# Altium PCB CommsPCB.PcbDoc
Units mm, origin at the board's own origin, x right, y up, seen from the top; angles counter-clockwise.
Board outline 85 x 80 mm, 4 copper layers (Top Layer, Internal Plane 1, Internal Plane 2, Bottom Layer), stack 1.782 mm thick; 124 components, 97 nets, 364 pads, 92 vias.
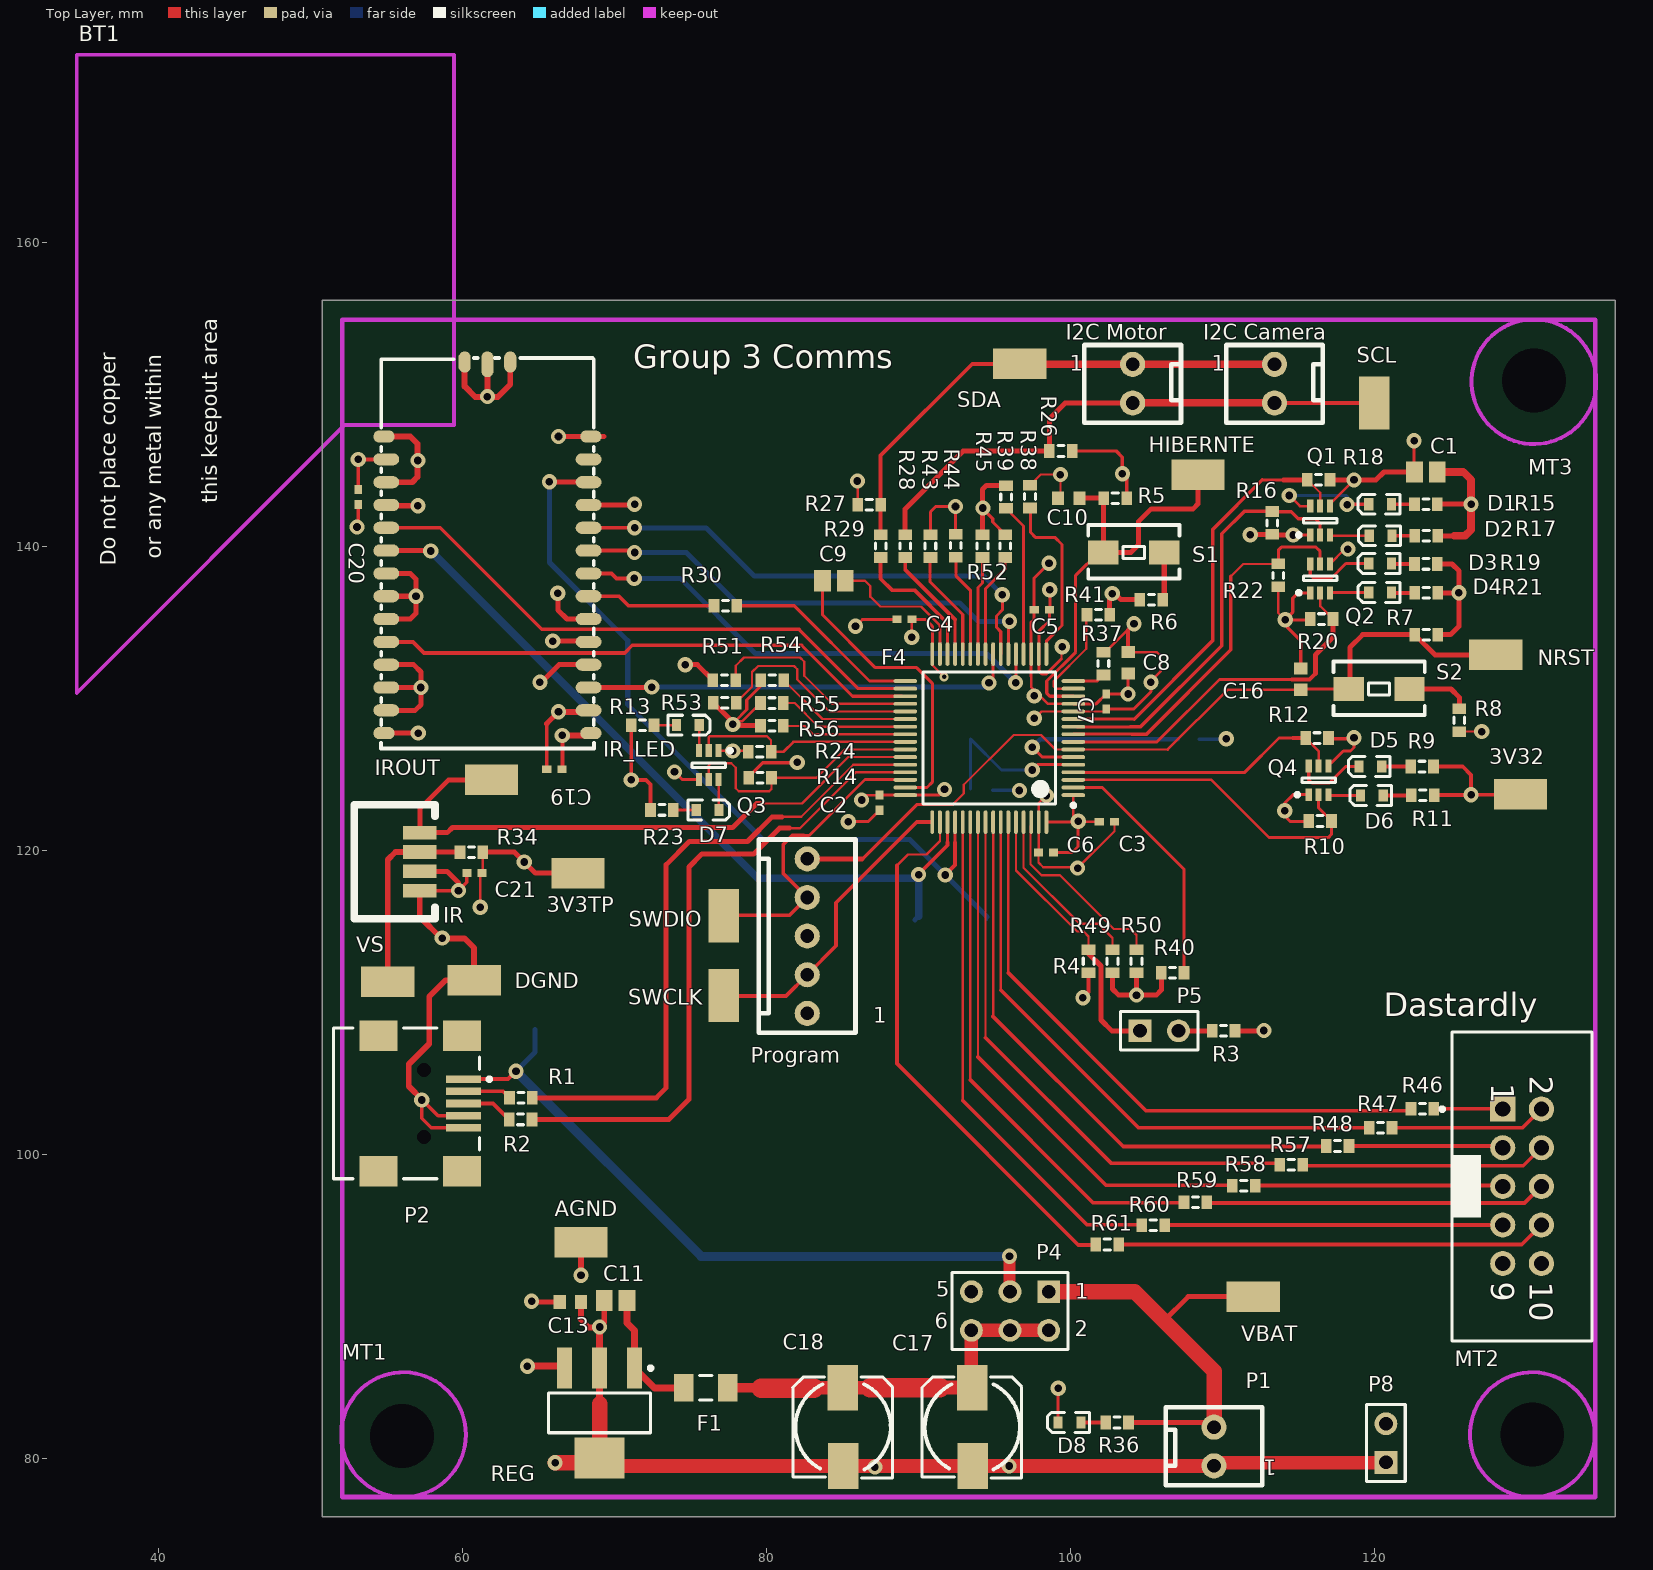
[diagram p0: Top Layer view]
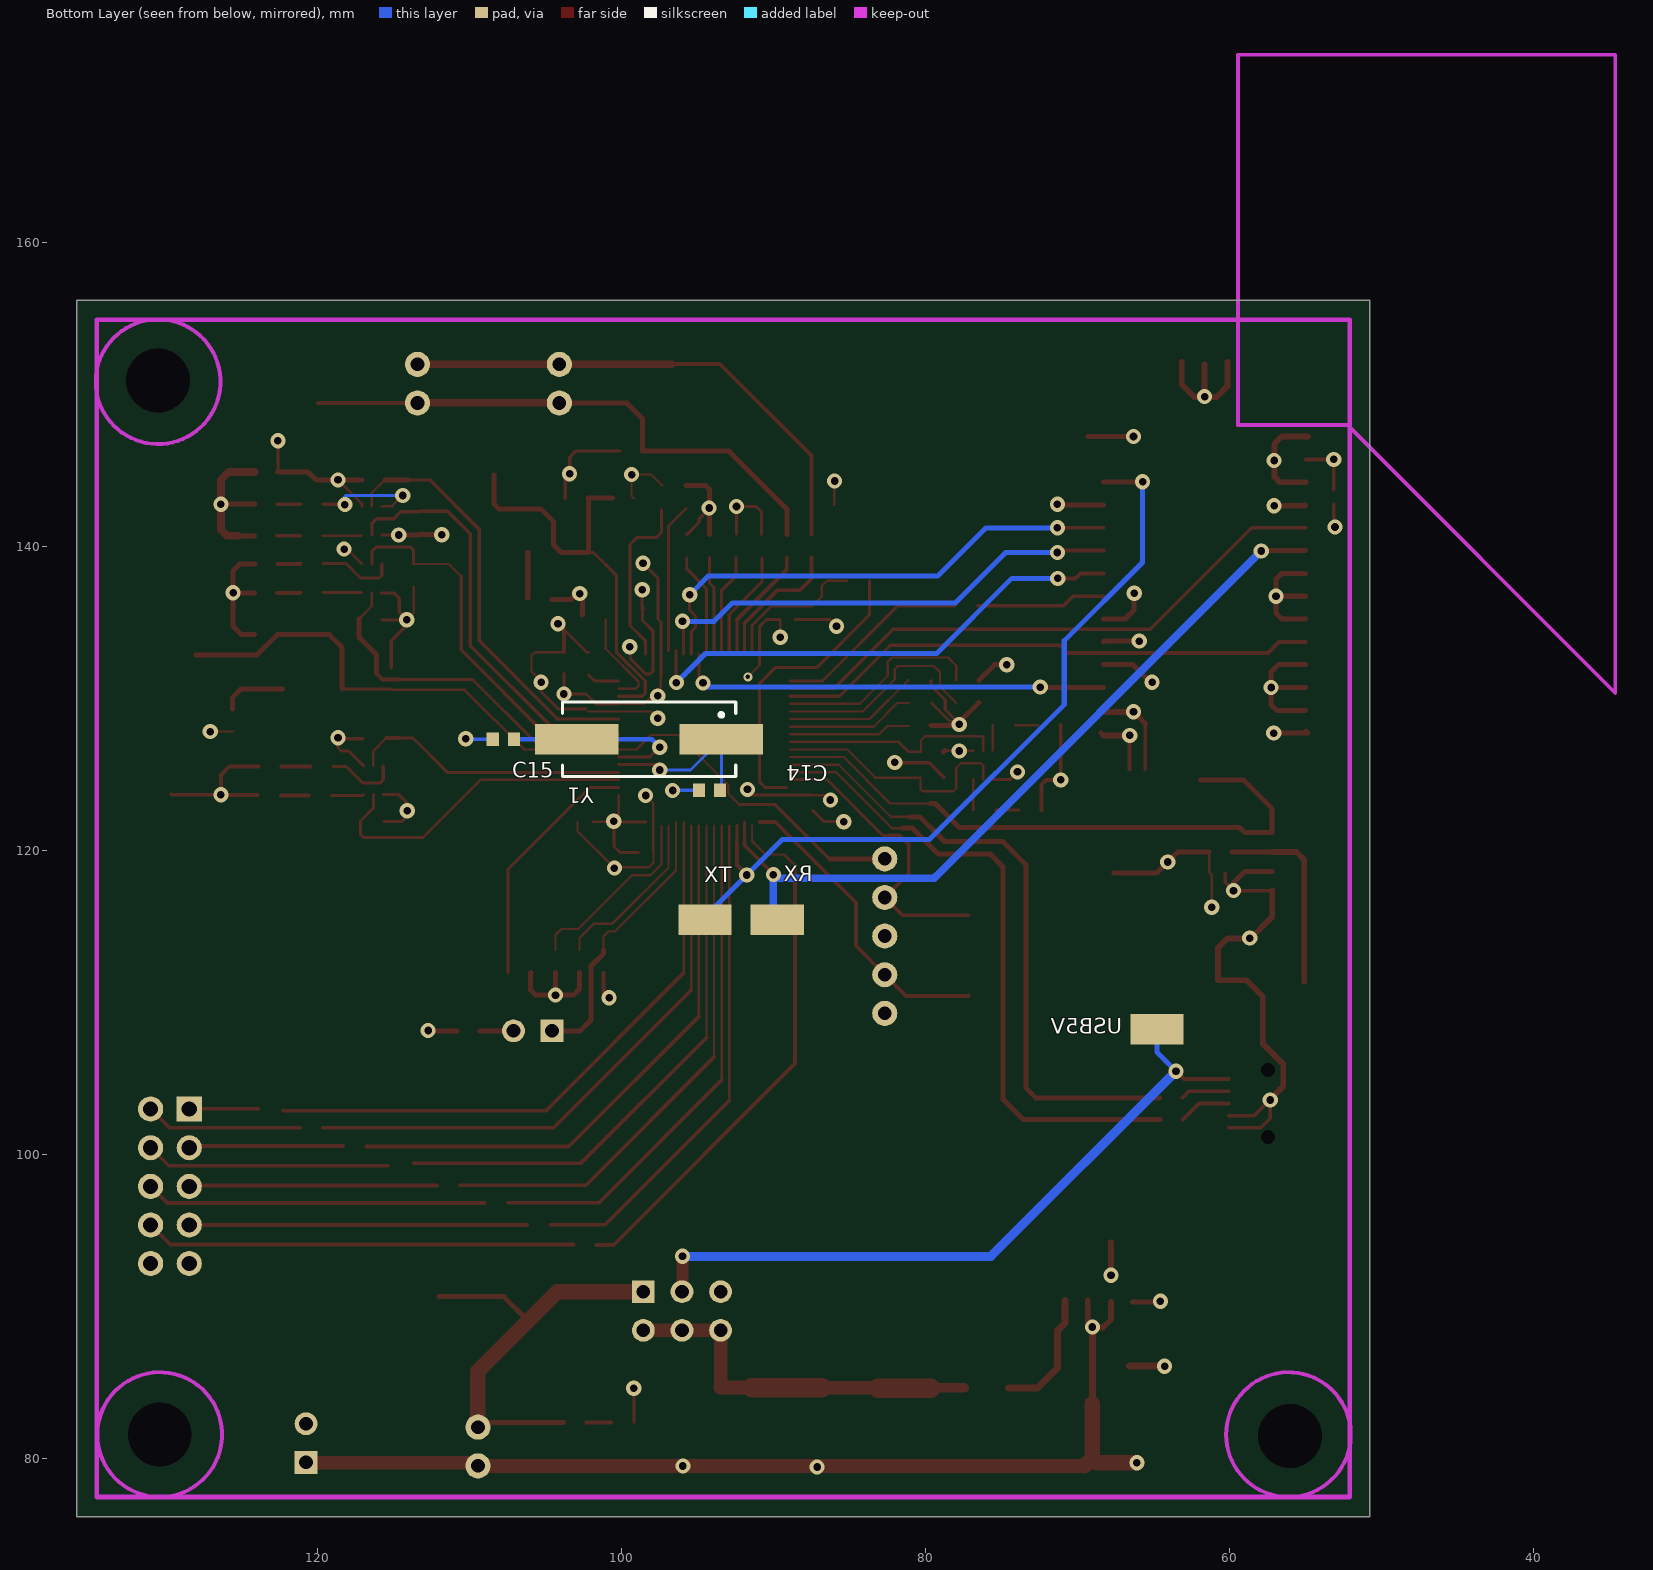
[diagram p1: Bottom Layer view, seen from below]
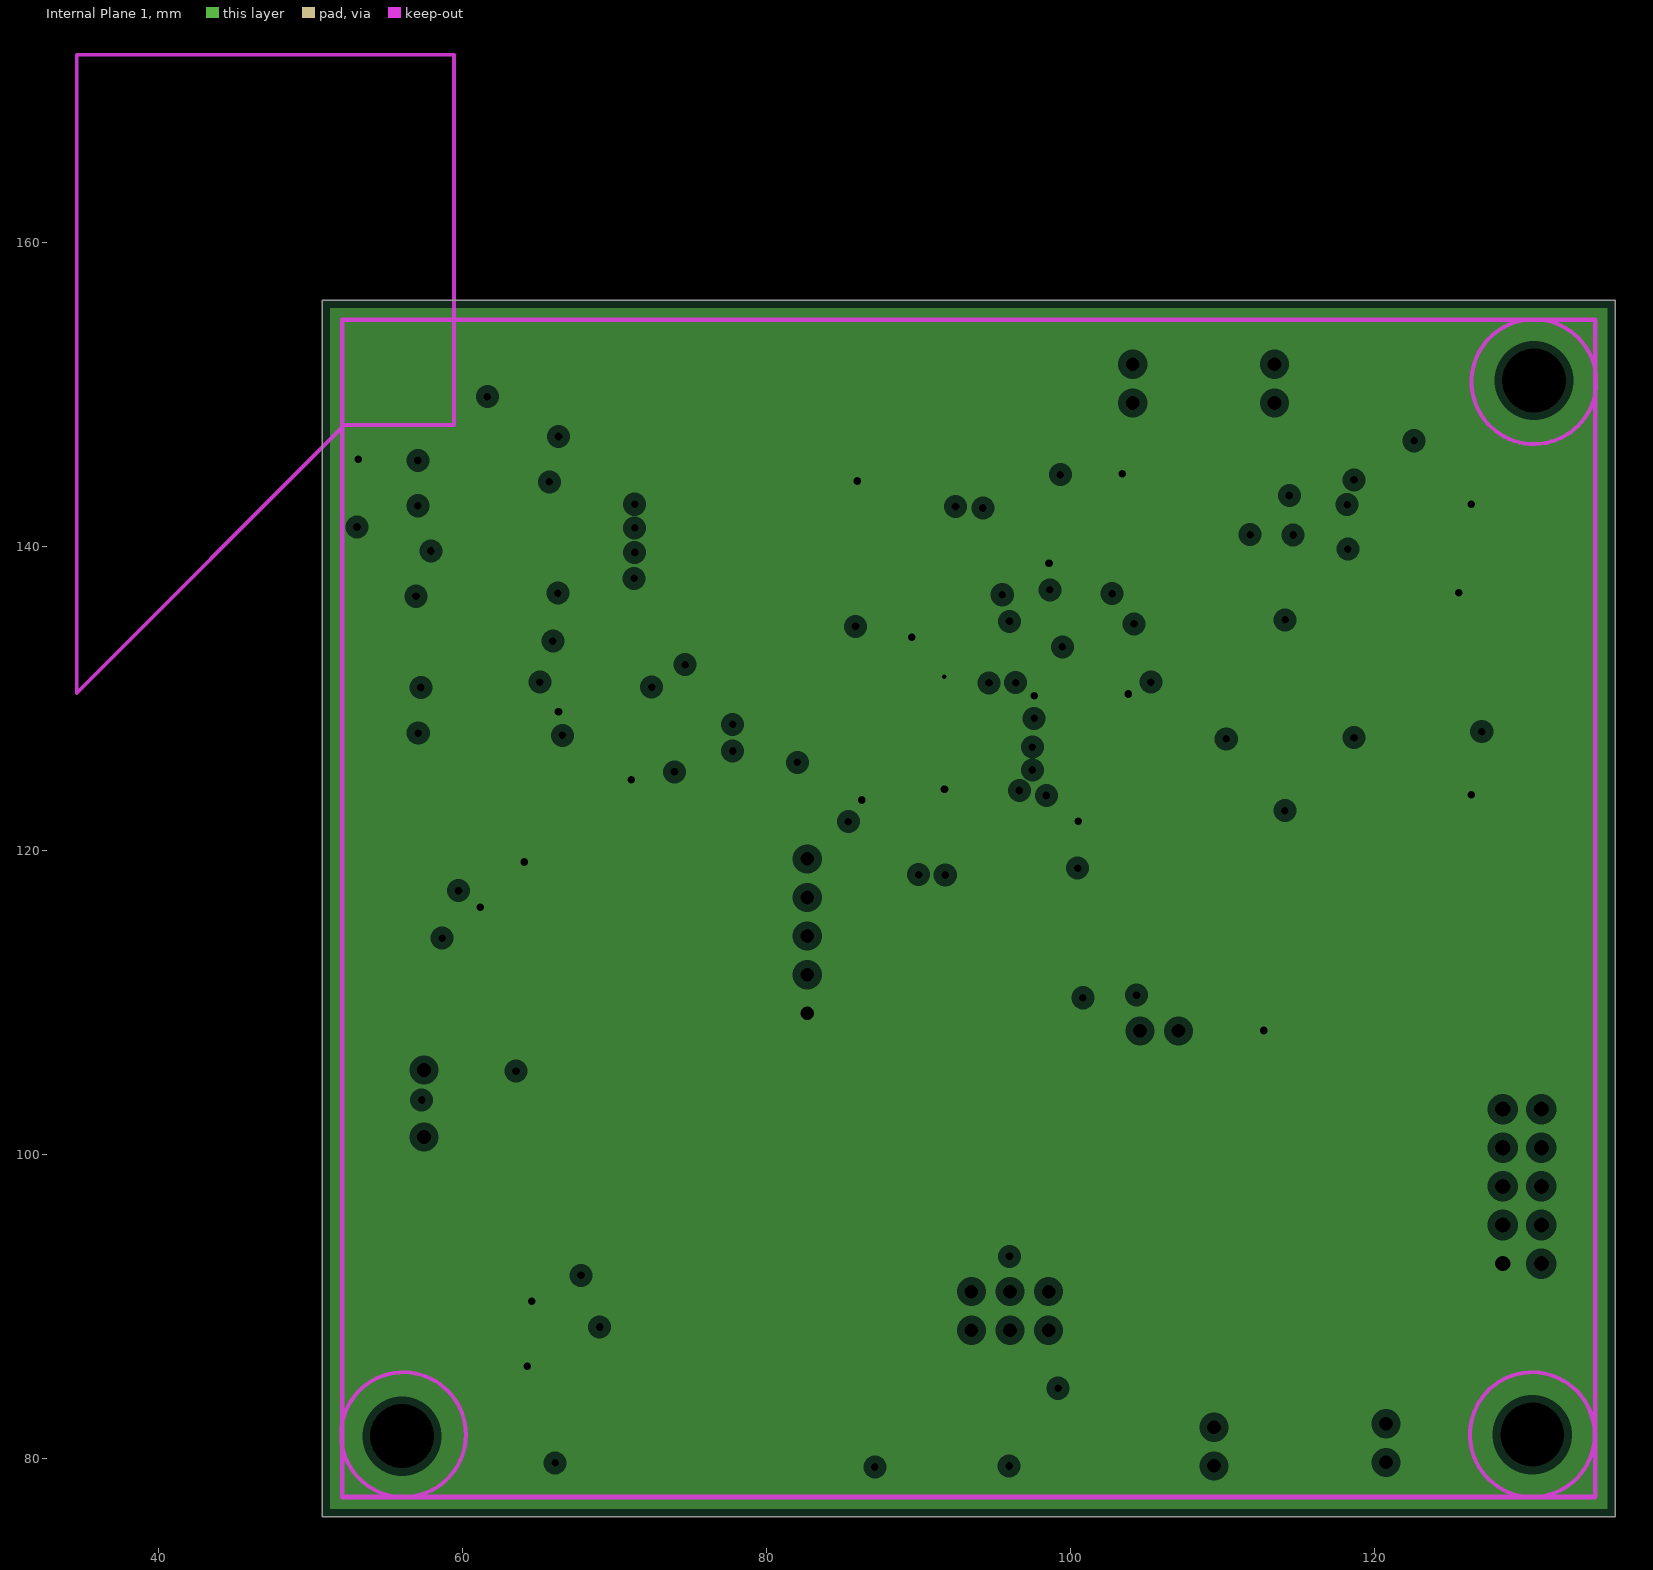
[diagram p2: Internal Plane 1, clearances drawn from the general rule]
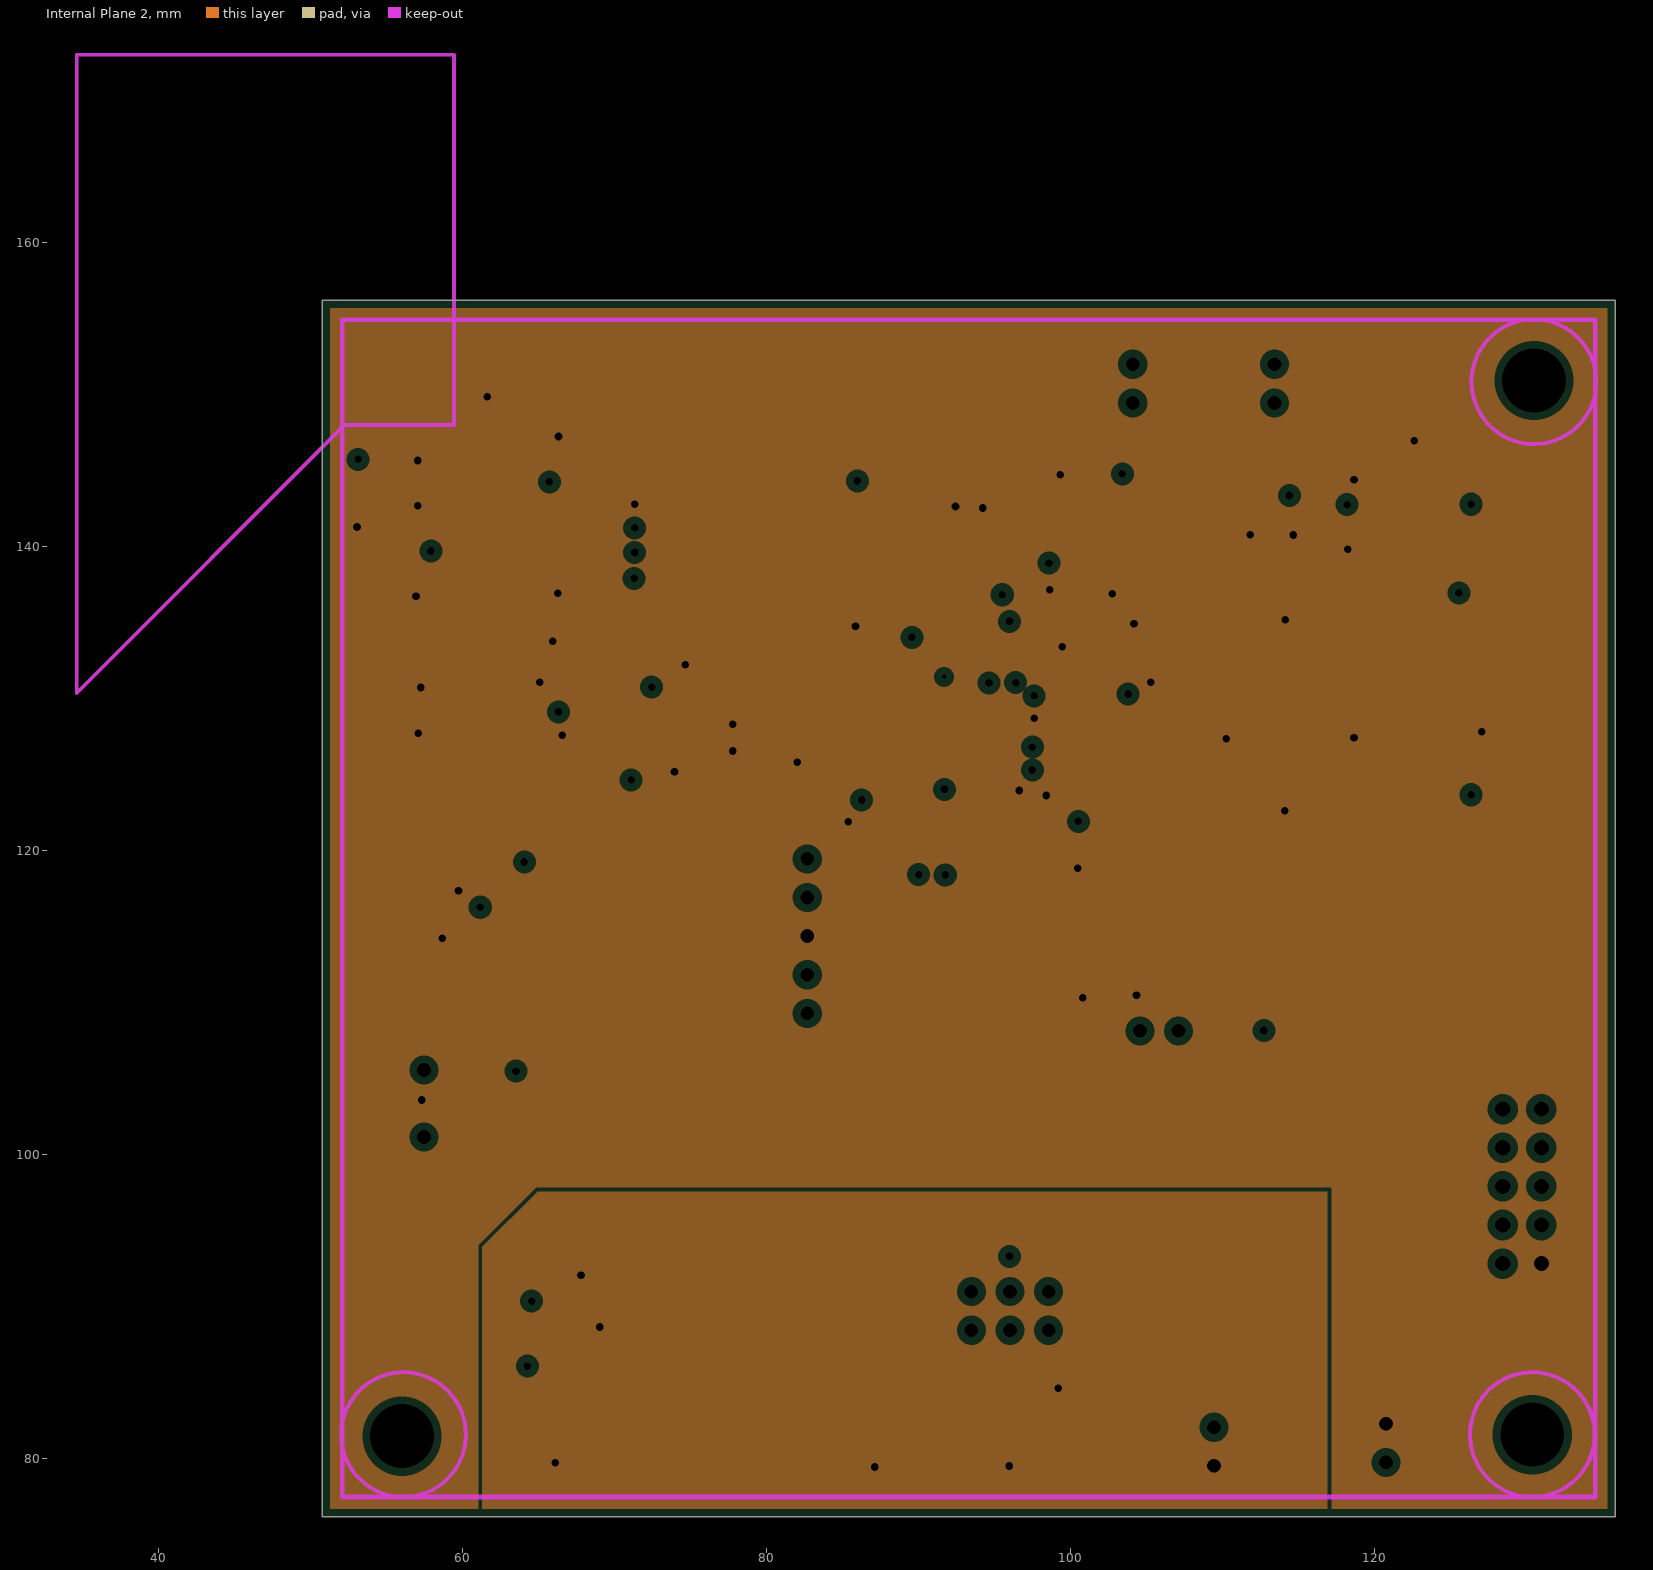
[diagram p3: Internal Plane 2, clearances drawn from the general rule]

## Layer stack, top to bottom
Top Layer: signal copper 0.0356
Dielectric: prepreg 0.32, FR-4, Dk 4.8
Internal Plane 1: plane copper 0.0356, net 3V3
Dielectric: core 1, FR-4, Dk 4.8
Internal Plane 2: plane copper 0.0356, net (Multiple Nets)
Dielectric: prepreg 0.32, FR-4, Dk 4.8
Bottom Layer: signal copper 0.0356

## Board outline
50.8,76.2 135.8,76.2 135.8,156.2 50.8,156.2

## Design rules (kind name [scope] priority, off if disabled: settings)
Clearance Clearance_6 [width = 0.15 vs width = 0.15] p1 off: gap=0.3
Clearance Clearance_5 [width = 0.2 vs width = 0.2] p2 off: gap=0.4
Clearance Clearance_4 [width = 0.254 vs width = 0.254] p3 off: gap=0.5
Clearance Clearance_3 [width = 0.3 vs width = 0.3] p4 off: gap=0.6
Clearance Clearance_2 [width =  0.4 vs width = 0.4] p5 off: gap=0.8
Clearance Clearance_1 [width = 0.5 vs Width = 0.5] p6 off: gap=1
Clearance [All] p7: gap=0.15
HoleSize [All] p1: absolutevalues=TRUE maxlimit=5 minlimit=0.3 maxpercent=80.000 minpercent=20.000
MinimumAnnularRing [All] p1: minimumring=0.1
MinimumSolderMaskSliver [All] p1: minsoldermaskwidth=0.1
PasteMaskExpansion [All] p1: expansion=0.2
PlaneClearance [All] p1: clearance=0.508
PlaneConnect [All] p1: planeconnectstyle=Relief reliefexpansion=0.508 reliefentries=4 reliefconductorwidth=0.254 reliefairgap=0.254
PolygonConnect [All] p1: connectstyle=Relief reliefconductorwidth=0.254 reliefentries=4 polygonreliefangle="90 Angle" airgapwidth=0.254
RoutingVias [All] p1: holewidth=0.6 width=1.2 viastyle="Through Hole" minholewidth=0.6 minwidth=1.27 maxholewidth=0.7 maxwidth=1.4
SMDNeckDown [All] p1: percent=50.000
SMDToCorner [All] p1: distance=78740
SMDToPlane [All] p1: distance=1968504
SilkToSolderMaskClearance SilkscreenOverComponentPads [IsPad] p1: minsilkscreentomaskgap=0.254 clearancetoexposedcopper=TRUE
SolderMaskExpansion [All] p1: expansion=0.15
Width [All] p1: maxlimit=2 minlimit=0.15 preferedwidth=0.25 minimp=50.000000 maximp=50.000000 favimp=50.000000
22 further rules are at their usual default settings.

## Classes and differential pairs
component class Micro: C1 C2 C3 C4 C5 C6 C7 C8 C9 C10 C11 C13 C14 C15 C16 C17 C18 D8 F1 P1 P2 P4 P5 P8 Program R1 R2 R3 R4 R5 R6 R7 R8 R36 REG S1 S2 Y1
component class Debug: 3V3TP 3V32 13mil AGND D1 D2 D3 D4 D5 D6 D7 Dastardly DGND HIBERNTE IR_LED IROUT MT1 MT2 MT3 NRST Q1 Q2 Q3 Q4 R9 R10 R11 R12 R13 R14 R15 R16 R17 R18 R19 R20 R21 R22 R23 R24 R37 R38 R39 R40 R41 R43 R44 R45 R46 R47 R48 R49 R50 R51 R52 R53 R54 R55 R56 R57 R58 R59 R60 R61 RX SCL SDA SWCLK SWDIO TX USB5V VBAT VS
component class Comms: BT1 C19 C20 C21 F4 "I2C Camera" "I2C Motor" IR R26 R27 R28 R29 R30 R34

## Components (designator, comment, footprint, x,y, rotation, side; value= is the part's Value field where it differs from the comment)
3V3TP "3V3" TEST_POINT_3.5X2MM#1 67.6,118.525 r0 top
3V32 "3V3" TEST_POINT_3.5X2MM#1 129.575,123.7 r0 top
AGND "GND" TEST_POINT_3.5X2MM#1 67.8,94.25 r0 top
BT1 "#NAME?" WT12_Bluetooth 61.65,126.725 r90 top
C1 "4.7uF" CAPC2012L 123.35,144.9 r0 top
C2 "100nF" CAPC1005L 87.425,123.15 r90 top
C3 "100nF" CAPC1005L 102.375,121.9 r180 top
C4 "100nF" CAPC1005L 89.075,135.2 r0 top
C5 "100nF" CAPC1005L 98.1,135.85 r180 top
C6 "100nF" CAPC1005L 98.375,119.875 r0 top
C7 "100nF" CAPC1005L 102.325,129.8 r90 top
C8 "1uF" CAPC1608L 103.775,132.35 r270 top
C9 "2.2uF" CAPC2012L 84.425,137.75 r180 top
C10 "10nF" CAPC1608L 99.875,143.175 r0 top
C11 "2.2uF" CAPC2012L 70.075,90.425 r180 top
C13 "1uF" CAPC1608L 67.1,90.325 r180 top
C14 "10nF" CAPC1608L 94.2,123.975 r180 bottom
C15 "10nF" CAPC1608L 107.75,127.325 r180 bottom
C16 "10nF" CAPC1608L 115.125,131.275 r270 top
C17 "100uF/16V" NICH-1 93.525,82.1 r90 top
C18 "100uF/16V" NICH-1 85.025,82.1 r90 top
C19 "100nF" CAPC1005L 66.05,125.35 r0 top
C20 "100nF" CAPC1005L 53.15,143.25 r270 top
C21 "100nF" CAPC1005L 60.8,118.525 r0 top
D1 "#NAME?" LED0.8X1.6 120.35,142.775 r180 top
D2 "#NAME?" LED0.8X1.6 120.375,140.7 r180 top
D3 "#NAME?" LED0.8X1.6 120.35,138.875 r180 top
D4 "#NAME?" LED0.8X1.6 120.35,136.975 r180 top
D5 "#NAME?" LED0.8X1.6 119.7,125.525 r180 top
D6 "#NAME?" LED0.8X1.6 119.8,123.625 r180 top
D7 "#NAME?" LED0.8X1.6 76.125,122.675 r0 top
D8 "#NAME?" LED0.8X1.6 99.925,82.4 r180 top
Dastardly "Header 5X2 Vert" IDC2.54-V10D 129.675,97.925 r270 top (schematic designator Breakout)
DGND "GND" TEST_POINT_3.5X2MM#1 60.775,111.475 r180 top
F1 "1A" RESC3216N 76,84.675 r180 top
F4 "STM32F405RGT6" TQFP64_L 94.65,127.4 r180 top
HIBERNTE "MCU Hibernate" TEST_POINT_3.5X2MM#1 108.375,144.7 r180 top
"I2C Camera" "2 Pin Molex KK HDR" MOLEX_KK_2_HDR 113.4,151.975 r270 top
"I2C Motor" "2 Pin Molex KK HDR" MOLEX_KK_2_HDR 104.075,151.975 r270 top
IR "IR_Receiver" IR 58.2,115.525 r90 top
IR_LED "#NAME?" LED0.8X1.6 74.825,128.25 r0 top
IROUT "IR_OUT" TEST_POINT_3.5X2MM#1 61.925,124.65 r180 top
MT1 "M4.2 NPTH" MNT-HOLE_4.2mm_NPTH#1 56.13,81.6 r0 top
MT2 "M4.2 NPTH" MNT-HOLE_4.2mm_NPTH#2 130.35,81.6 r0 top
MT3 "M4.2 NPTH" MNT-HOLE_4.2mm_NPTH#3 130.457,150.83 r0 top
NRST "NRST" TEST_POINT_3.5X2MM#1 127.95,132.875 r180 top
P1 "2 Pin Molex KK HDR" MOLEX_KK_2_HDR 109.425,79.55 r90 top
P2 "JS_USB_MINI_B" USB/SM0.8-6H5 52.225,103.375 r180 top
P4 "Header 3X2" HDR2X3 98.55,91 r180 top
P5 "Header 2" HDR1X2 104.55,108.15 r0 top
P8 "Header 2" HDR1X2 120.725,79.775 r90 top
Program "5 Pin Molex KK Hdr" MOLEX_KK_5_HDR 82.675,109.3 r90 top
Q1 "DUAL-NFET" SOT363-6N 116.4,141.7 r90 top
Q2 "DUAL-NFET" SOT363-6N 116.4,137.9 r90 top
Q3 "DUAL-NFET" SOT363-6N 76.2,125.625 r270 top
Q4 "DUAL-NFET" SOT363-6N 116.3,124.625 r90 top
R1 "22R" RESC1608L 63.85,103.75 r180 top
R2 "22R" RESC1608L 63.825,102.325 r180 top
R3 "220R" RESC1608L 110.05,108.15 r0 top
R4 "22K" RESC1608L 101.175,112.725 r90 top
R5 "10K" RESC1608L 102.925,143.175 r0 top
R6 "470R" RESC1608L 105.3,136.5 r180 top
R7 "10K" RESC1608L 123.375,134.2 r0 top
R8 "470R" RESC1608L 125.55,128.575 r270 top
R9 "39R" RESC1608L 123.1,125.525 r0 top
R10 "1M" RESC1608L 116.4,121.95 r0 top
R11 "39R" RESC1608L 123.15,123.65 r0 top
R12 "1M" RESC1608L 116.2,127.4 r180 top
R13 "39R" RESC1608L 71.85,128.25 r180 top
R14 "1M" RESC1608L 79.575,124.8 r0 top
R15 "39R" RESC1608L 123.35,142.775 r0 top
R16 "1M" RESC1608L 113.25,141.55 r90 top
R17 "39R" RESC1608L 123.375,140.7 r0 top
R18 "1M" RESC1608L 116.3,144.375 r180 top
R19 "39R" RESC1608L 123.35,138.85 r0 top
R20 "1M" RESC1608L 116.5,135.225 r0 top
R21 "39R" RESC1608L 123.375,136.95 r0 top
R22 "1M" RESC1608L 113.65,138.1 r90 top
R23 "39R" RESC1608L 73.125,122.675 r180 top
R24 "1M" RESC1608L 79.55,126.5 r0 top
R26 "4K7" RESC1608L 99.35,146.275 r0 top
R27 "4K7" RESC1608L 86.75,142.75 r0 top
R28 "100R" RESC1608L 89.114,140.025 r90 top
R29 "100R" RESC1608L 87.5,140.025 r90 top
R30 "100R" RESC1608L 77.3,136.1 r180 top
R34 "100R" RESC1608L 60.6,119.9 r180 top
R36 "160R" RESC1608L 103.05,82.4 r0 top
R37 "1K" RESC1608L 102.15,132.3 r270 top
R38 "1K" RESC1608L 97.325,143.275 r270 top
R39 "1K" RESC1608L 95.75,143.25 r270 top
R40 "1K" RESC1608L 106.7,111.975 r0 top
R41 "1K" RESC1608L 101.825,135.5 r180 top
R43 "1K" RESC1608L 90.775,140.025 r270 top
R44 "1K" RESC1608L 92.45,140.05 r270 top
R45 "1K" RESC1608L 94.2,140.025 r270 top
R46 "1K" RESC1608L 123.125,103.025 r180 top
R47 "1K" RESC1608L 120.375,101.775 r0 top
R48 "1K" RESC1608L 117.55,100.575 r180 top
R49 "1K" RESC1608L 102.75,112.725 r270 top
R50 "1K" RESC1608L 104.325,112.725 r270 top
R51 "1K" RESC1608L 77.225,131.2 r0 top
R52 "1K" RESC1608L 95.7,140.025 r270 top
R53 "1K" RESC1608L 77.25,129.725 r0 top
R54 "1K" RESC1608L 80.375,131.2 r0 top
R55 "1K" RESC1608L 80.35,129.7 r0 top
R56 "1K" RESC1608L 80.35,128.2 r0 top
R57 "1K" RESC1608L 114.5,99.35 r0 top
R58 "1K" RESC1608L 111.375,97.975 r0 top
R59 "1K" RESC1608L 108.2,96.875 r0 top
R60 "1K" RESC1608L 105.425,95.375 r0 top
R61 "1K" RESC1608L 102.4,94.1 r0 top
REG "LT1963" SOT223-4M 69.025,83.025 r270 top
RX "UARTRX" TEST_POINT_3.5X2MM#2 89.75,115.45 r0 top
S1 "EVQPNF05M" EVQPNF05M 104.15,139.6 r0 top
S2 "EVQPNF05M" EVQPNF05M 120.275,130.625 r0 top
SCL "I2C2SCL" TEST_POINT_3.5X2MM#1 119.95,149.425 r90 top
SDA "I2C2SDA" TEST_POINT_3.5X2MM#1 96.65,152 r0 top
SWCLK "SWCLK" TEST_POINT_3.5X2MM#1 77.175,110.475 r90 top
SWDIO "SWDIO" TEST_POINT_3.5X2MM#1 77.2,115.725 r90 top
TX "UARTTX" TEST_POINT_3.5X2MM#2 94.5,115.45 r0 top
USB5V "Vusb" TEST_POINT_3.5X2MM#2 64.775,108.25 r180 top
VBAT "Vbat" TEST_POINT_3.5X2MM#1 112,90.675 r0 top
VS "Vs" TEST_POINT_3.5X2MM#1 55.1,111.375 r180 top
Y1 "8MHz" HC49/4h_SMX 98.175,127.325 r0 bottom

## Footprints (in the part's own frame and the unit in brackets; to place one, negate y for a bottom-side part, rotate by r counter-clockwise, add the part's x,y. Pads: shape width x height; smd on the part's side, far side on the other; paste and mask are expansions set on the pad)
CAPC1005L [mm] "Chip Capacitor, Body 1.0x0.5mm, IPC High Density"
  rect 0.6x0.5 smd: 1(-0.5,0) 2(0.5,0)
  body extent -0.55,-0.3 0.55,0.3, height 0.6
CAPC1608L [mm] "Chip Capacitor, Body 1.6x0.8mm, IPC High Density"
  rect 0.8x0.9 smd: 1(-0.7,0) 2(0.7,0)
  body extent -0.87,-0.48 0.87,0.48, height 0.85
CAPC2012L [mm] "Chip Capacitor, Body 2.0x1.3mm, IPC High Density"
  rect 1.1x1.4 smd: 1(-0.75,0) 2(0.75,0)
  body extent -1.1,-0.72 1.1,0.72, height 1.1
EVQPNF05M [mm] "Panansonic light touch SMD push button switch"
  rect 2x1.6 smd: 1(-2,0) 2(2,0)
  silkscreen extent -3,-1.7 3,1.8, body extent -3,-1.7 3,1.8, height 5
HC49/4h_SMX [mm] "Quartz Crystal, SM; Body 13.4 (inc. leads) x 4.9 mm (LxW max)"
  rect 5.5x2 smd: 1(-4.75,0) 2(4.75,0)
  silkscreen extent -5.7,-2.45 5.7,2.45, body extent -5.61,-2.35 5.56,2.35, height 4
HDR1X2 [mm] "Connector; Header; 2 Position"
  rect 1.5x1.5 hole 0.9: 1(0,0)
  round 1.5 hole 0.9: 2(2.54,0)
  silkscreen extent -1.27,-1.27 3.81,1.27
HDR2X3 [mm] "Connector; Header; 3x2 Position"
  rect 1.5x1.5 hole 0.9: 1(0,0)
  round 1.5 hole 0.9: 2(0,2.54) 3(2.54,0) 4(2.54,2.54) 5(5.08,0) 6(5.08,2.54)
  silkscreen extent -1.27,-1.27 6.35,3.81
IDC2.54-V10D [mm] "Connector; IDC, Low Profile Male Header, Thru-Hole; 10 Position; Vertical; Pitch 2.54 mm; Body 20.32 x 9.2 x 9.45 mm (LxWxH)"
  rect 1.65x1.65 hole 1: 1(-5.08,-1.27)
  round 1.65 hole 1: 2(-5.08,1.27) 3(-2.54,-1.27) 4(-2.54,1.27) 5(0,-1.27) 6(0,1.27) 7(2.54,-1.27) 8(2.54,1.27) 9(5.08,-1.27) 10(5.08,1.27)
  silkscreen extent -10.16,-5.37 10.16,4.6, body extent -10.16,-4.6 10.16,4.6, height 9.45
IR [mm] "IR footprint"
  rect 0.9x2.2 smd: 1(1.845,1) 2(3.115,1) 3(4.385,1) 4(5.655,1)
  silkscreen extent 0,0 7.5,5.3
LED0.8X1.6 [mm] "LED 0603"
  rect 0.6x0.8 smd: 1(-0.75,0) 2(0.75,0)
  silkscreen extent -1.3,-0.65 1.45,0.65
MNT-HOLE_4.2mm_NPTH#1 [mm] "Mounting Hole 4.2mm non plated"
  round 0 hole 4.2 unplated: 1(-0.1,-0.1)
  Keep-Out Layer circle w0.254: c0,0 r4.1
MNT-HOLE_4.2mm_NPTH#2 [mm] "Mounting Hole 4.2mm non plated"
  round 0 hole 4.2 unplated: 1(0,0)
  Keep-Out Layer circle w0.254: c0,0 r4.1
MNT-HOLE_4.2mm_NPTH#3 [mm] "Mounting Hole 4.2mm non plated"
  round 0 hole 4.2 unplated: 1(0,0.08)
  Keep-Out Layer circle w0.254: c0,0 r4.1
MOLEX_KK_2_HDR [mil] "MOLEX_KK_2_HDR"
  round 65 hole 35.43: 1(0,0) 2(100,0)
  silkscreen extent -50,-125 152,125, body extent -44,-121 146,119, height 630
MOLEX_KK_5_HDR [mil] "MOLEX_KK_5_HDR"
  round 65 hole 35.43: 1(0,0) 2(100,0) 3(200,0) 4(300,0) 5(400,0)
  silkscreen extent -50,-125 450,125, body extent -44,-118 444,118, height 630
NICH-1 [mm] "Electrolytic capacitor"
  rect 3x2 smd: 1(-2.561,-0.022) 2(2.584,0.011)
  silkscreen extent -3.34,-3.25 3.3,3.3, body extent -3.2,-3.21 3.2,3.2, height 5.3
RESC1608L [mm] "Chip Resistor, Body 1.6x0.8mm, IPC High Density"
  rect 0.7x0.9 smd: 1(-0.75,0) 2(0.75,0)
  silkscreen extent -0.2,-0.35 0.2,0.35, body extent -0.85,-0.48 0.85,0.48, height 0.9
RESC3216N [mm] "Chip Resistor, Body 3.2x1.6mm, IPC Medium Density"
  rect 1.3x1.8 smd: 1(-1.45,0) 2(1.45,0)
  silkscreen extent -0.4,-0.8 0.4,0.8, body extent -1.68,-0.87 1.68,0.87, height 0.71
SOT223-4M [mm] "SOT223, 4-Leads, Body 6.5x3.5mm, Pitch 2.3mm, Lead Span 7mm, IPC Low Density"
  rect 2.7x1 smd: 1(-2.95,2.3) 2(-2.95,0) 3(-2.95,-2.3)
  rect 2.7x3.3 smd: 4(2.95,0)
  silkscreen extent -3.07,-3.35 1.3,3.48, body extent -1.85,-3.35 1.85,3.35, height 1.8
SOT363-6N [mm] "SOT363, 6-Leads, Body 2x1.3mm, Pitch 0.65mm, Lead Span 2.1mm, IPC Medium Density"
  rect 0.85x0.4 smd: 1(-0.95,0.65) 2(-0.95,0) 3(-0.95,-0.65) 4(0.95,-0.65) 5(0.95,0) 6(0.95,0.65)
  silkscreen extent -1.07,-1.1 0.15,1.52, body extent -0.7,-1.1 0.7,1.1, height 1
TEST_POINT_3.5X2MM#1 [mm] "Test Point Pad"
  rect 3.5x2 smd: 1(0,0)
  body extent -1.75,-1.01 1.75,1, height 2
TEST_POINT_3.5X2MM#2 [mm] "Test Point Pad"
  rect 3.5x2 smd far side: 1(0,0)
  body extent -1.75,-1.01 1.75,1, height 2
TQFP64_L [mm] "Thin QFP, 64-Leads, Body 10x10mm, Pitch 0.5mm, IPC High Density"
  oval 1.55x0.25 smd: 1(-5.525,3.75) 2(-5.525,3.25) 3(-5.525,2.75) 4(-5.525,2.25) 5(-5.525,1.75) 6(-5.525,1.25) 7(-5.525,0.75) 8(-5.525,0.25) 9(-5.525,-0.25) 10(-5.525,-0.75) 11(-5.525,-1.25) 12(-5.525,-1.75) 13(-5.525,-2.25) 14(-5.525,-2.75) 15(-5.525,-3.25) 16(-5.525,-3.75) 33(5.525,-3.75) 34(5.525,-3.25) 35(5.525,-2.75) 36(5.525,-2.25) 37(5.525,-1.75) 38(5.525,-1.25) 39(5.525,-0.75) 40(5.525,-0.25) 41(5.525,0.25) 42(5.525,0.75) 43(5.525,1.25) 44(5.525,1.75) 45(5.525,2.25) 46(5.525,2.75) 47(5.525,3.25) 48(5.525,3.75)
  oval 0.25x1.55 smd: 17(-3.75,-5.525) 18(-3.25,-5.525) 19(-2.75,-5.525) 20(-2.25,-5.525) 21(-1.75,-5.525) 22(-1.25,-5.525) 23(-0.75,-5.525) 24(-0.25,-5.525) 25(0.25,-5.525) 26(0.75,-5.525) 27(1.25,-5.525) 28(1.75,-5.525) 29(2.25,-5.525) 30(2.75,-5.525) 31(3.25,-5.525) 32(3.75,-5.525) 49(3.75,5.525) 50(3.25,5.525) 51(2.75,5.525) 52(2.25,5.525) 53(1.75,5.525) 54(1.25,5.525) 55(0.75,5.525) 56(0.25,5.525) 57(-0.25,5.525) 58(-0.75,5.525) 59(-1.25,5.525) 60(-1.75,5.525) 61(-2.25,5.525) 62(-2.75,5.525) 63(-3.25,5.525) 64(-3.75,5.525)
  silkscreen extent -5.65,-4.35 4.35,4.55, body extent -5,-5 5,5, height 1.6
USB/SM0.8-6H5 [mm] "Connector; USB2.0, Type B, SM; 5 Position; Right Angle"
  rect 2.3x0.5 smd: 1(-7.85,-1.6) 2(-7.85,-0.8) 3(-7.85,0) 4(-7.85,0.8) 5(-7.85,1.6)
  rect 2.5x2 smd: 6(-7.75,4.45) 7(-2.25,4.45) 8(-7.75,-4.45) 9(-2.25,-4.45)
  round 0.6 hole 0.9 unplated: MH1(-5.25,2.2) MH2(-5.25,-2.2)
  silkscreen extent -9.68,-4.95 0.7,4.95, body extent -8.9,-4.95 0.7,4.95, height 3.9
WT12_Bluetooth [mm] "WT12 Bluetooth Module"
  oval 0.8x1.4 smd: 1(20.5,6.8) 14(1,6.8) 15(1,-6.8) 28(20.5,-6.8)
  oval 0.8x1.7 smd: 2(19,6.65) 3(17.5,6.65) 4(16,6.65) 5(14.5,6.65) 6(13,6.65) 7(11.5,6.65) 8(10,6.65) 9(8.5,6.65) 10(7,6.65) 11(5.5,6.65) 12(4,6.65) 13(2.5,6.65) 16(2.5,-6.65) 17(4,-6.65) 18(5.5,-6.65) 19(7,-6.65) 20(8.5,-6.65) 21(10,-6.65) 22(11.5,-6.65) 23(13,-6.65) 24(14.5,-6.65) 25(16,-6.65) 26(17.5,-6.65) 27(19,-6.65)
  oval 1.4x0.8 smd: 29(25.4,-1.5) 31(25.4,1.5)
  oval 1.7x0.8 smd: 30(25.25,0)
  Keep-Out Layer lines w0.254: 21.25,6.95 21.25,2.2 45.6,2.2 45.6,27 28.75,27 17,27 3.65,27 21.25,9.4 21.25,6.65
  silkscreen extent 0,-7 25.65,7, body extent 0,-7 25.5,7, height 2.4

## Part data
3V3TP 3V32 AGND DGND HIBERNTE IROUT NRST RX SCL SDA SWCLK SWDIO TX USB5V VBAT VS: library part TP_TESTPOINT, "Test-Point SMD"
BT1: library part UN_WT12_Bluetooth, "BLUEGIGA - WT12-A-AI - BLUETOOTH MOD, V2.1, CLASS 2, 3MBPS"
C1: library part CC_4.7uF_0805, "CAP CER 4.7uF Y5V -20% +80% 16V 0805"
C2 C3 C4 C5 C6 C7 C19 C20 C21: library part CC_100nF_0402, "CAP CER 100nF X7R +-10% 16V 0402"
C8 C13: library part CC_1uF_0603, "CAP CER 1uF Y5V -20% +80% 16V 0603"
C9 C11: library part CC_2.2uF_0805, "CAP CER 2.2uF Y5V -20% +80% 25V 0805"
C10 C14 C15 C16: library part CC_10nF_0603, "CAP CER 10nF X7R +-10% 50V 0603"
C17 C18: library part CA_100uF_16V_SMD, "Nichcon WX series  SMT Aluminium Electrolytic Cap"
D1 D2 D5 D8: library part DL_TLMG1100, "LED Green 0603"
D3 D4 IR_LED: library part DL_TLMS1100, "LED Red 0603"
D6: library part DL_TLMY1100, "LED Yellow 0603"
D7: library part DL_TLMB1100, "LED Blue 0603"
Dastardly: library part JA_HDR_IDC_5X2_VERT, "IDC Header, 2,54mm, 10-Pin, Vert"
F1: library part FS_Fuse_1.0A_SMD_1206, "Fuse 1.0A Very Fast Acting 1206"
F4: "ARM Cortex-M4 32b MCU+FPU, 210DMIP, 1024 kB Flash, 192+4 kB RAM, 51 I/Os, 64-pin LQFP, -40 to +85°C, Tray"
"I2C Camera" "I2C Motor" P1: library part JA_MOLEX_KK_2POS, "CONN HEADER 2POS 2.54mm VERT_Thru Hole"
MT1 MT2 MT3: library part MC_M4.2_HOLE_NPT, "Fixing M4.2 Mount Hole NPTH"
P2: library part JS_USB_MINI_B_SMT, "USB 2.0, Right Angle, SMT, B Type, Receptacle, 5 Position,"
P4: "Header, 3-Pin, Dual row"
P5 P8: "Header, 2-Pin"
Program: library part JA_MOLEX_KK_5POS, "CONN HEADER 5POS 2.54mm VERT_Thru Hole"
R1 R2: library part RS_22R, "RES 22 OHM 1/10W 5% 0603 SMD"
R3: library part RS_220R, "RES 220 OHM 1/10W 5% 0603 SMD"
R4: library part RS_22K, "RES 22.0K OHM 1/10W 5% 0603 SMD"
R5 R7: library part RS_10K, "RES 10.0K OHM 1/10W 5% 0603 SMD"
R6 R8: library part RS_470R, "RES 470 OHM 1/10W 5% 0603 SMD"
R9 R11 R13 R15 R17 R19 R21 R23: library part RS_39R, "RES 39 OHM 1/10W 5% 0603 SMD"
R10 R12 R14 R16 R18 R20 R22 R24: library part RS_1M, "RES 1.0M OHM 1/10W 5% 0603 SMD"
R26 R27: library part RS_4K7, "RES 4.7K OHM 1/10W 5% 0603 SMD"
R28 R29 R30 R34: library part RS_100R, "RES 100 OHM 1/10W 5% 0603 SMD"
R36: library part RS_160R, "RES 160 OHM 1/10W 5% 0603 SMD"
R37 R38 R39 R40 R41 R43 R44 R45 R46 R47 R48 R49 R50 R51 R52 R53 R54 R55 R56 R57 R58 R59 R60 R61: library part RS_1K, "RES 1.0K OHM 1/10W 5% 0603 SMD"
S1 S2: library part WS_EVQPNF05M, "Panasonic 6 x 3.5mm SMD Light Touch Switch Type"
Y1: library part XT_8MHz_HC49/4H, "CRYSTAL 8.00 MHZ 18PF SMD"

## Via types
v1: diameter 1, hole 0.5, Top Layer to Bottom Layer, 64 vias
v2: diameter 1, hole 0.5, Top Layer to Bottom Layer, tented top, 22 vias
v3: diameter 1, hole 0.5, Top Layer to Bottom Layer, tented both sides, 5 vias
v4: diameter 0.6, hole 0.3, Top Layer to Bottom Layer, tented top, 1 vias

## Nets (pads, with @x,y where several pads share a name; then routed paths per layer and width w, separated by ;. In a path a pad name is that pad's centre, name@x,y a point inside that pad or via, vN(x,y) a via of type N, cw(c..) or ccw(c..) an arc to the next point about the centre after c; other vN are vias at no path point)
3V3: 3V3TP.1 3V32.1 BT1.2 BT1.16 C1.2 C2.2 C3.2 C4.2 C5.2 C6.2 C7.2 C8.2 C13.2 C19.1 C20.1 C21.2 Dastardly.9 F4.1 F4.13 F4.19 F4.32 F4.48 F4.64 Program.1 R3.2 R5.2 R7.2 R9.2 R11.2 R13.2 R15.2 R17.2 R19.2 R21.2 R23.2 R26.2 R27.1 R34.1 REG.3 | length 107.2
  Top Layer w0.15: v1(61.175,116.275) 61.175,118.4 C21.2 61.35,118.575 R34.1 ; v1(64.55,90.375) v1@64.6,90.325 ; v1(85.975,144.3) 86,144.275 R27.1 ; v1(89.55,134.025) 89.55,135.175 C4.2 ; F4.32@90.9,132.2 v4@91.475,131.625 ; 97.4,135.025 97.6,135.225 ; v1@112.675,108.15 v1(112.7,108.175)
  Top Layer w0.178: v1(86.25,123.325) 86.575,123.65 C2.2 ; 97.4,131.45 97.4,130.75 v3@97.75,130.4 ; v3@97.787,130.363 98.5,129.65 F4.13 ; F4.64 v1@100.45,121.875 ; F4.1 100.175,122.25 v1(100.5,121.925) ; v1@100.525,121.9 C3.2
  Top Layer w0.2: C2.2 91.325,123.65 v2(91.7,124.025) ; C4.2 90.45,135.2 90.9,134.75 90.9,134.375 F4.32@90.9,132.2 ; 97.4,131.45 97.4,135.025 ; 97.6,135.225 C5.2 97.6,137.925 v1(98.575,138.9) ; C6.2 100.075,119.875 100.475,120.275 v1@100.475,121.9 ; F4.13 101.675,129.65 C7.2 v2(103.775,130.3) C8.2
  Top Layer w0.229: BT1.16@68.2,129.125 BT1.16 ; R26.2 103,146.275 103.4,145.875 v1(103.4,144.775) 103.675,144.5 R5.2
  Top Layer w0.25: C20.1 v1(53.15,145.725) BT1.2 ; C19.1 65.55,128.35 ; R13.2 v1(71.1,124.65) 72.075,124.65 72.375,124.35 R23.2 ; v3(97.6,130.175) v3@97.787,130.363
  Top Layer w0.254: R9.2 125.775,125.525 126.325,124.975 v1(126.325,123.675) 129.55,123.675 3V32.1 ; R11.2 v1@126.3,123.65
  Top Layer w0.33: R34.1 63.425,119.9 64.8,118.525 3V3TP.1 ; v1@64.6,90.325 C13.2 ; v4(91.675,131.425) 91.725,131.375 v4@91.7,131.4 ; R3.2 v1@112.675,108.15 ; R19.2 125.075,138.85 125.525,138.4 v1(125.525,136.95) ; R15.2 v1(126.325,142.775) ; R7.2 124.975,134.2 125.525,134.75 v1(125.525,136.95) ; R21.2 v1(125.525,136.95) ; R17.2 125.225,140.7
  Top Layer w0.35: 65.55,128.35 v2(66.325,129.125)
  Top Layer w0.4: v2(66.325,129.125) BT1.16@68.2,129.125
  Top Layer w0.457: v1(64.275,86.1) REG.3@66.6,86.1
  Top Layer w0.508: C1.2 125.8,144.9 126.325,144.375 v1(126.325,142.775) ; 125.225,140.7 125.925,140.7 126.325,141.1 v1(126.325,142.775)
  other v1: 64.075,119.25
AGND: AGND.1 C11.2 C13.1 C17.1 C18.1 D8.2 P1.1 P8.1 REG.2 REG.4 | length 72.6
  Top Layer w0.2: D8.2 v1(99.175,84.65)
  Top Layer w0.381: C13.1 67.8,89.175 68.325,88.65 69,88.65 v1(69.025,88.675) 69.325,88.975 C11.2 ; v1(67.8,92.075) AGND.1
  Top Layer w0.457: 69.025,83.625 REG.2 v1(69.025,88.675)
  Top Layer w0.889: REG.4@69.561,79.539 C18.1 C17.1 109.314,79.539 109.525,79.75 120.7,79.75 P8.1
  Top Layer w1.016: v1(66.1,79.75) 68.7,79.75 REG.4 ; 69.025,83.625 REG.4 ; REG.4@69.561,79.539 REG.4 ; P1.1@109.525,79.75 P1.1@109.55,79.775
  other v2: 87.125,79.475 95.95,79.539
BOOT0: F4.60 P5.1 R4.2 | length 18.4
  Top Layer w0.15: F4.60 96.4,118.7 100.425,114.675 100.85,114.675 101.175,114.35 R4.2
  Top Layer w0.33: R4.2 101.175,113.225 101.985,112.415 101.985,108.865 102.7,108.15 P5.1
BT_RES: BT1.17 F4.24 | length 28.4
  Top Layer w0.2: v2(94.625,131.025) 94.9,131.3 F4.24
  Top Layer w0.33: BT1.17 v1@72.425,130.725
  Bottom Layer w0.33: v1(72.45,130.75) 94.35,130.75 v2(94.625,131.025)
BTD: D7.2 Q3.6 | length 2
  Top Layer w0.178: D7.2@76.825,122.725 D7.2 ; D7.2@76.85,122.75 Q3.6
BTMISO: BT1.23 F4.22 | length 31.5
  Top Layer w0.2: F4.22 v1@95.9,135
  Top Layer w0.25: BT1.23 v1@71.2,139.725
  Bottom Layer w0.33: v1(71.325,139.6) 74.725,139.6 78.05,136.275 92.7,136.275 93.9,135.075 v1(95.975,135.075)
BTMOSI: BT1.24 F4.23 | length 33.2
  Top Layer w0.2: F4.23 95.4,134.4 95.115,134.685 95.115,135.431 95.5,135.816 v1(95.5,136.825)
  Top Layer w0.25: BT1.24 v1(71.325,141.225)
  Bottom Layer w0.33: v1(71.325,141.225) 76.025,141.225 79.2,138.05 94.275,138.05 v1(95.5,136.825)
BTSCK: BT1.22 F4.21 | length 33.2
  Top Layer w0.15: v2(96.375,131.05) v2@96.4,131.075
  Top Layer w0.2: v2@96.4,131.075 F4.21@96.4,133.15
  Top Layer w0.25: BT1.22 69.8,138.225 70.125,137.9 v1(71.3,137.9)
  Bottom Layer w0.33: v1(71.3,137.9) 74.325,137.9 79.263,132.962 94.463,132.962 v2(96.375,131.05)
D1D: D1.2 Q1.6 | length 7.5
  Top Layer w0.178: v1(114.375,143.35) 115.075,142.65 Q1.6 ; v1(118.175,142.75) 118.625,142.75 v1@118.65,142.775
  Top Layer w0.229: v1@118.65,142.775 D1.2
  Bottom Layer w0.178: v1(114.375,143.35) 118.125,143.35 118.2,143.275 118.2,142.775 v1(118.175,142.75)
D2D: D2.2 Q1.3 | length 2.5
  Top Layer w0.178: Q1.3@117.1,140.7 D2.2
D3D: D3.2 Q2.6 | length 5.1
  Top Layer w0.2: Q2.6 115.75,138.1 115.925,137.925 117.142,137.925 118.092,138.875 D3.2
D4D: D4.2 Q2.3 | length 2.5
  Top Layer w0.2: Q2.3@117.075,136.975 D4.2
DGND: BT1.1 BT1.3 BT1.4 BT1.7 BT1.8 BT1.9 BT1.11 BT1.12 BT1.13 BT1.14 BT1.15 BT1.18 BT1.19 BT1.20 BT1.25 BT1.28 BT1.29 BT1.30 BT1.31 C1.1 C2.1 C3.1 C4.1 C5.1 C6.1 C7.1 C8.1 C10.1 C14.1 C15.1 C16.1 C19.2 C20.2 C21.1 Dastardly.10 DGND.1 F4.12 F4.18 F4.63 IR.1 IR.2 P2.4 P2.5 P8.2 Program.3 Q1.1 Q1.4 Q2.1 Q2.4 Q3.1 Q3.4 Q4.1 Q4.4 R4.1 R6.2 R8.2 R10.1 R12.1 R14.1 R16.1 R18.1 R20.1 R22.1 R24.1 R37.1 R38.1 R39.1 R40.1 R41.1 R43.1 R44.1 R45.1 R49.2 R50.2 R51.1 R52.1 R53.1 R54.1 R55.1 R56.1 | length 223.6
  Top Layer w0.15: R38.1@97.3,144 R38.1 98.025,144.725 v1(99.325,144.725) 99.325,143.325 C10.1 ; v3@97.4,128.475 98.075,129.15 C7.1@102.175,129.15 ; C6.1 97.875,119.225 98.2,118.9 100.4,118.9 v1(100.45,118.85) 102.875,121.275 C3.1 ; C6.1@97.9,119.9 97.9,123.125 v2(98.4,123.625) ; 99.4,132.585 v1@99.4,133.45 ; C8.1 105.675,133.05 105.9,132.825 105.9,131.775 ; R22.1 113.65,135.625 v1(114.1,135.175) ; C16.1@115.1,132 C16.1 ; R20.1@115.7,135.175 R20.1 ; R12.1 R12.1@117,127.35 ; Q2.4 118.025,139.825 v1(118.225,139.825) ; v1@118.55,127.35 v1(118.625,127.425) ; C1.1@122.575,144.925 C1.1 ; R8.2 v1(127.025,127.825)
  Top Layer w0.178: Q3.1 R24.1@78.725,126.575 ; v1@77.725,128.5 v1@77.925,128.5 ; 78.7,129.275 v1@77.925,128.5 ; R55.1 78.4,128.5 v1@77.925,128.5 ; v1(85.85,134.75) 86.3,135.2 C4.1 ; C5.1@98.525,135.925 C5.1 ; R37.1 102.3,133.05 103.775,134.525 ; v1(111.8,140.775) v1@111.825,140.8 ; R16.1 R16.1@113.3,140.75 ; v1(114.625,140.75) Q1.1 ; Q1.4 117.05,142.8 v1(118.625,144.375)
  Top Layer w0.2: v1(73.95,125.175) 74.45,124.675 Q3.4 ; 78.7,129.275 78.7,129.9 79.625,130.825 R54.1 ; v1(85.375,121.9) 86.675,121.9 C2.1 ; R43.1 90.775,142.275 91.125,142.625 v1(92.425,142.625) R44.1@92.425,140.825 ; v1@94.2,142.5 94.875,141.825 94.875,141.6 R52.1 ; C5.1 98.6,135.125 97.9,134.425 F4.18 97.9,131.825 98.103,131.622 98.403,131.622 99.382,132.602 ; C5.1@98.625,135.875 v1(98.625,137.15) ; C7.1 104.125,129.3 105.275,130.45 v1(105.275,131.075) 105.275,131.15 105.9,131.775 ; C16.1@115.125,132.025 115.125,133.8 114.1,134.825 v1(114.1,135.175) ; R10.1@115.6,121.9 114.45,121.9 114.075,122.275 v1(114.075,122.625) 114.075,123.125 114.625,123.675 Q4.1 ; R20.1@115.7,135.175 v1(114.1,135.175) ; Q2.1 114.95,136.95 114.6,136.6 114.6,135.675 v1(114.1,135.175) ; Q4.4 117.925,126.55 118.4,126.55 118.625,126.775 v1(118.625,127.425) ; C1.1@122.575,144.925 v1(122.575,146.95)
  Top Layer w0.229: IR.1 v1(59.745,117.37) 60.3,117.925 C21.1 ; P2.5 57.95,101.775 57.325,102.4 v3(57.325,103.6) 57.375,103.6 58.4,102.575 P2.4 ; R14.1@78.8,124.825 79.761,125.786 82.011,125.786 v1(82.025,125.8)
  Top Layer w0.25: v1@53.15,141.35 C20.2 ; C19.2@66.575,125.375 v2(66.575,127.575) ; Program.3@82.305,114.38 Program.3 ; v1(100.8,110.325) 101.175,110.7 R4.1 ; C8.1 103.775,134.525 v1(104.163,134.913) ; R12.1@117,127.35 v1@118.55,127.35
  Top Layer w0.33: BT1.14@55,127.875 BT1.14 v2(57.1,127.725) ; BT1.13 56.9,129.225 57.275,129.6 v2(57.275,130.725) ; BT1.12 v2(57.275,130.725) ; BT1.11 56.8,132.225 57.275,131.75 v2(57.275,130.725) ; BT1.9 56.575,135.225 56.95,135.6 v2(56.95,136.725) ; BT1.8 v2(56.95,136.725) ; BT1.7 56.575,138.225 56.95,137.85 v2(56.95,136.725) ; BT1.4 55.05,142.675 v2(57.075,142.675) ; IR.2 58.985,118.64 59.745,117.88 v1(59.745,117.37) ; v2(65.1,131.075) 65.2,131.075 66.35,132.225 BT1.18 ; v2(65.95,133.775) 68.25,133.775 BT1.19 ; v2(66.275,136.925) 66.275,135.825 66.875,135.225 BT1.20 ; v2(66.325,147.225) BT1.28 69.3,147.225 ; BT1.15@68.3,127.575 BT1.15 ; BT1.25 v1@71.15,142.725 ; v1(74.65,132.225) 75.45,132.225 R51.1 ; R53.1@76.475,129.75 R53.1 77.725,128.5 78,128.225 R56.1@79.625,128.225 ; R24.1@78.725,126.575 R24.1 ; R45.1 94.2,142.5 94.2,143.75 94.45,144 R39.1 ; R41.1 102.55,135.525 102.55,136.5 102.725,136.675 v1(102.725,136.9) ; R49.2 102.75,110.9 103.15,110.5 v1(104.325,110.5) ; v1@102.9,136.9 103.3,136.5 R6.2 ; R50.2 v1(104.325,110.5) ; R40.1 105.975,111.95 105.975,110.85 105.625,110.5 v1(104.325,110.5) ; v1@111.825,140.8 R16.1 ; R16.1@113.3,140.75 v1(114.625,140.75) ; R18.1 120.075,144.375 120.6,144.9 C1.1
  Top Layer w0.381: BT1.1 56.575,147.225 57.05,146.75 57.05,144.575 56.7,144.225 BT1.3 ; IR.1 57.2,115.65 58.625,114.225 60.15,114.225 60.775,113.6 DGND.1 58.9,111.475 57.825,110.4 57.825,107.3 56.475,105.95 56.475,104.5 v3@57.375,103.6 ; BT1.31 60.15,150.525 60.85,149.825 62.325,149.825 63.15,150.65 BT1.29 ; v2(61.65,149.85) BT1.30
  Top Layer w0.4: v2(66.575,127.575) BT1.15@68.3,127.575
  Bottom Layer w0.25: C14.1 v2@96.6,123.975 ; C15.1 v1@110.2,127.325
  other v1: 58.675,114.25 77.775,126.55 110.225,127.35 77.775,128.3 99.45,133.4 53.075,141.275 94.225,142.525 71.325,142.775
  other v2: 96.625,123.95 57.075,145.65
  other v3: 97.6,128.7
IRD: IR_LED.2 Q3.3 | length 1.7
  Top Layer w0.15: Q3.3@75.575,126.6 IR_LED.2
"MCU ON INDICATOR D": D5.2 Q4.6 | length 4.8
  Top Layer w0.2: Q4.6 115.65,124.65 115.85,124.45 117,124.45 118.075,125.525 D5.2
"MCU STANDBY INDICATOR D": D6.2 Q4.3 | length 2.1
  Top Layer w0.178: Q4.3 Q4.3@117,123.625
  Top Layer w0.2: Q4.3@117,123.625 D6.2
NCSB: F4.33 R30.1 | length 12.9
  Top Layer w0.2: 81.825,136.1 86.775,131.15 F4.33@88.9,131.15
  Top Layer w0.25: R30.1 81.825,136.1
NetBreakout_1: Dastardly.1 R46.1 | length 4.5
  Top Layer w0.25: R46.1 Dastardly.1@128.385,103.025
NetBreakout_2: Dastardly.2 R47.2 | length 10.3
  Top Layer w0.25: R47.2 129.715,101.775 Dastardly.2
NetBreakout_3: Dastardly.3 R48.1 | length 10.1
  Top Layer w0.25: R48.1 Dastardly.3@128.295,100.575 ; Dastardly.3@128.32,100.55 Dastardly.3
NetBreakout_4: Dastardly.4 R57.2 | length 16.1
  Top Layer w0.25: R57.2@115.325,99.275 129.755,99.275 Dastardly.4
NetBreakout_5: Dastardly.5 R58.2 | length 16.2
  Top Layer w0.25: R58.2 Dastardly.5@128.355,97.975
NetBreakout_6: Dastardly.6 R59.2 | length 22.4
  Top Layer w0.25: R59.2@109,96.825 129.845,96.825 Dastardly.6
NetBreakout_7: Dastardly.7 R60.2 | length 22.2
  Top Layer w0.25: R60.2@106.185,95.385 Dastardly.7
NetBreakout_8: Dastardly.8 R61.2 | length 28.3
  Top Layer w0.25: R61.2 129.66,94.1 ; 129.685,94.125 Dastardly.8
NetBT1_6: BT1.6 F4.51 RX.1 | length 51.2
  Top Layer w0.15: v1(90,118.425) v1@90,118.45
  Top Layer w0.2: 91.9,120.55 F4.51
  Top Layer w0.25: v1@90,118.45 91.9,120.35 91.9,120.55
  Top Layer w0.33: BT1.6 v2@57.9,139.725
  Bottom Layer w0.33: RX.1 RX.1@90,115.7 ; v1@89.869,118.294 v1(90,118.425)
  Bottom Layer w0.508: v2(57.925,139.7) 79.331,118.294 ; 79.436,118.175 v1@89.975,118.175 ; RX.1@90,115.7 v1(90,118.425)
NetBT1_21: BT1.21 R30.2 | length 8.5
  Top Layer w0.25: BT1.21 70.3,136.725 70.925,136.1 R30.2
NetBT1_26: BT1.26 F4.52 TX.1 | length 52.5
  Top Layer w0.2: 92.4,120.525 F4.52@92.4,121.65
  Top Layer w0.25: v1(91.75,118.4) 92.4,119.05 92.4,120.525
  Top Layer w0.33: v2@65.75,144.225 BT1.26
  Bottom Layer w0.15: TX.1 TX.1@94.5,115.65
  Bottom Layer w0.33: v2(65.725,144.25) 65.725,138.95 70.875,133.8 70.875,129.6 79.75,120.725 89.425,120.725 v1(91.75,118.4) TX.1@94.5,115.65
NetBT_1: 
NetC9_1: C9.1 F4.31 | length 9.5
  Top Layer w0.15: C9.1 86.475,137.75 86.825,137.4 86.825,136.7 87.475,136.05 90.15,136.05 91.4,134.8
  Top Layer w0.2: F4.31@91.4,133.15 91.4,134.8
NetC9_2: C9.2 F4.47 | length 19.8
  Top Layer w0.2: C9.2 83.675,135.5 87.15,132.025 89.875,132.025 90.9,131 90.9,124.5 90.55,124.15 F4.47
NetC10_2: C10.2 F4.14 HIBERNTE.1 R5.1 S1.1 | length 28.3
  Top Layer w0.15: R5.1@102.15,143.15 R5.1
  Top Layer w0.2: F4.14 98.625,130.15 98.425,130.35 98.425,131.15 100.325,133.05 100.325,138.1 101.825,139.6 S1.1
  Top Layer w0.33: C10.2 R5.1 ; R5.1@102.15,143.15 S1.1 103.95,139.6 104.45,140.1 104.45,141.625 105.3,142.475 108.05,142.475 108.375,142.8 HIBERNTE.1
NetC17_2: C17.2 C18.2 F1.1 P4.2 P4.4 P4.6 | length 24.9
  Top Layer w0.508: 83.125,84.65 83.159,84.684
  Top Layer w0.635: F1.1 79.625,84.675
  Top Layer w0.889: 83.159,84.684 C18.2 86.809,84.684 ; 91.425,84.7 C17.2@93.497,84.7 ; C17.2@93.47,84.727 P4.6 P4.4 P4.2
  Top Layer w1.27: 79.65,84.65 83.125,84.65 ; 86.809,84.684 91.409,84.684 91.425,84.7
NetD1_1: D1.1 R15.1 | length 1.5
  Top Layer w0.254: D1.1 R15.1
NetD2_1: D2.1 R17.1 | length 1.5
  Top Layer w0.254: D2.1 R17.1
NetD3_1: D3.1 R19.1 | length 1.5
  Top Layer w0.254: D3.1 121.125,138.85 R19.1
NetD4_1: D4.1 R21.1 | length 1.5
  Top Layer w0.254: D4.1 121.125,136.95 R21.1
NetD5_1: D5.1 R9.1 | length 1.9
  Top Layer w0.25: D5.1 R9.1
NetD6_1: D6.1 R11.1 | length 1.8
  Top Layer w0.25: D6.1 R11.1@122.375,123.625
NetD7_1: D7.1 R23.1 | length 1.5
  Top Layer w0.178: R23.1 D7.1
NetD8_1: D8.1 R36.1 | length 1.6
  Top Layer w0.25: D8.1 R36.1
NetF4_2: F4.2 R40.2 | length 16.3
  Top Layer w0.2: F4.2 102.075,124.15 107.45,118.775 R40.2
NetF4_3: F4.3 Q4.2 R10.2 | length 21.6
  Top Layer w0.178: F4.3 109.25,124.65 113.05,120.85
  Top Layer w0.2: 113.05,120.85 116.925,120.85 117.15,121.075 R10.2 116.3,122.8 Q4.2
NetF4_4: F4.4 Q4.5 R12.2 | length 18.4
  Top Layer w0.15: R12.2 116.3,126.55 Q4.5
  Top Layer w0.2: F4.4 111.45,125.15 113.7,127.4 114.6,127.4
  Top Layer w0.25: 114.6,127.4 R12.2
NetF4_8: F4.8 Q2.2 R20.2 | length 23.9
  Top Layer w0.15: Q2.2 116.4,136.075 R20.2
  Top Layer w0.2: F4.8 105.675,127.15 109.777,131.252 114.56,131.252
  Top Layer w0.254: 114.56,131.252 115.698,131.252 116.1,131.654
  Top Layer w0.33: 116.1,131.654 116.1,132.875 117.25,134.025 R20.2
NetF4_9: F4.9 Q2.5 R22.2 | length 25.6
  Top Layer w0.15: 110.525,138.025 111.35,138.85 R22.2
  Top Layer w0.2: F4.9 100.185,127.66 104.01,127.66 ; R22.2 113.65,139.75 113.85,139.95 116.126,139.95 116.4,139.676 Q2.5
  Top Layer w0.229: 104.01,127.66 104.985,127.66 110.525,133.2 110.525,138.025
NetF4_10: F4.10 Q1.2 R16.2 | length 27.3
  Top Layer w0.15: R16.2 R16.2@113.275,142.275
  Top Layer w0.2: F4.10@100.4,128.15 100.409,128.141 103.916,128.141 ; Q1.2 116.4,141.5
  Top Layer w0.229: 103.916,128.141 104.591,128.141 109.925,133.475 109.925,140.825 111.4,142.3 R16.2 ; R16.2@113.275,142.275 114.5,142.275 114.95,141.825 116.075,141.825 116.4,141.5
NetF4_11: F4.11 Q1.5 R18.2 | length 28.2
  Top Layer w0.15: R18.2 116.4,143.525 Q1.5
  Top Layer w0.2: F4.11 104.175,128.65 ; 112.6,144.375 114,144.375
  Top Layer w0.229: 104.175,128.65 109.325,133.8 109.325,141.1 112.6,144.375
  Top Layer w0.33: 114,144.375 R18.2
NetF4_15: F4.15 R41.2 | length 6.6
  Top Layer w0.15: F4.15 99.05,130.65 98.875,130.825 98.875,131.125 101.025,133.275 R41.2@101.025,135.175
NetF4_16: F4.16 R37.2 | length 2.1
  Top Layer w0.2: F4.16 101.75,131.15 R37.2
NetF4_17: F4.17 R38.2 | length 11.5
  Top Layer w0.2: R38.2@97.35,142.4 97.35,140.925 97.675,140.6 98.95,140.6 99.425,140.125 99.425,134.8 98.4,133.775 F4.17
NetF4_20: F4.20 R39.2 | length 9.8
  Top Layer w0.2: R39.2 96.9,141.35 F4.20@96.9,133.15
NetF4_25: F4.25 R52.2 | length 6.7
  Top Layer w0.15: 95.7,138.525 R52.2
  Top Layer w0.2: F4.25@94.4,133.15 94.4,137.225 95.7,138.525
NetF4_26: F4.26 R45.2 | length 6.2
  Top Layer w0.2: F4.26@93.9,133.15 93.9,137.3 94.2,137.6 R45.2
NetF4_27: F4.27 R44.2 | length 6.5
  Top Layer w0.2: R44.2 92.45,138.075 93.4,137.125 F4.27@93.4,133.15
NetF4_28: F4.28 R43.2 | length 7
  Top Layer w0.15: R43.2@90.75,139.25 R43.2
  Top Layer w0.2: R43.2@90.75,139.25 90.75,137.675 92.9,135.525 F4.28@92.9,133.15
NetF4_29: F4.29 R28.1 | length 7.5
  Top Layer w0.2: F4.29@92.4,133.15 92.4,135.2
  Top Layer w0.25: R28.1 89.114,138.486 92.4,135.2
NetF4_30: F4.30 R29.1 | length 8.8
  Top Layer w0.2: F4.30@91.9,133.15 91.9,134.95
  Top Layer w0.25: R29.1 87.5,137.875 88.25,137.125 89.725,137.125 91.9,134.95
NetF4_36: F4.36 R51.2 | length 13.9
  Top Layer w0.15: R51.2 77.975,132.15 78.525,132.7 82.2,132.7 82.475,132.425 82.475,131.5 84.325,129.65 F4.36@88.9,129.65
NetF4_37: F4.37 R53.2 | length 14.1
  Top Layer w0.15: R53.2 79.05,130.775 79.05,131.743 79.45,132.143 81.807,132.143 82.025,131.925 82.025,131.25 84.125,129.15 F4.37@88.9,129.15
NetF4_38: F4.38 R54.2 | length 8.8
  Top Layer w0.15: R54.2 83.675,128.65 F4.38@88.9,128.65
NetF4_39: F4.39 R55.2 | length 8.4
  Top Layer w0.15: R55.2 81.85,129.7 83.4,128.15 F4.39@88.9,128.15
NetF4_40: F4.40 R56.2 | length 8
  Top Layer w0.15: R56.2 82.5,128.2 83.05,127.65 F4.40@88.9,127.65
NetF4_41: F4.41 Q3.2 R24.2 | length 14.8
  Top Layer w0.15: Q3.2 76.2,127.475 76.25,127.525 80.025,127.525 80.3,127.25 R24.2 ; 81.775,127.15 F4.41@88.9,127.15
  Top Layer w0.178: R24.2 81.125,126.5 81.775,127.15
NetF4_42: F4.42 Q3.5 R14.2 | length 16.8
  Top Layer w0.15: Q3.5 76.2,125.6 76.35,125.75 77.675,125.75 77.975,125.45 77.975,125 77.975,124.1 78.175,123.9 80.175,123.9 80.325,124.05 R14.2 83.3,124.8 85.15,126.65 F4.42@88.9,126.65
NetF4_43: F4.43 IR.4 IROUT.1 | length 40.8
  Top Layer w0.15: 79.7,123.1 82.325,123.1 85.375,126.15 F4.43@88.9,126.15
  Top Layer w0.33: IROUT.1 59.1,124.65 57.2,122.75 IR.4 59.005,121.18 59.35,121.525 77.775,121.525 79.35,123.1 79.7,123.1
NetF4_44: F4.44 R1.1 | length 42
  Top Layer w0.15: 81.025,122.225 82.275,122.225 85.7,125.65 F4.44@88.9,125.65
  Top Layer w0.33: R1.1 72.75,103.75 73.4,104.4 73.4,119.075 74.925,120.6 78.75,120.6 80.375,122.225 81.025,122.225
NetF4_45: F4.45 R2.1 | length 42.7
  Top Layer w0.15: 81.501,121.48 81.506,121.475 82.2,121.475 85.875,125.15 F4.45@88.9,125.15
  Top Layer w0.33: R2.1 73.575,102.325 74.9,103.65 74.9,118.925 75.75,119.775 79.15,119.775 80.855,121.48 81.501,121.48
NetF4_46: F4.46 Program.4 SWDIO.1 | length 19.7
  Top Layer w0.15: F4.46@88.875,124.675 F4.46@88.9,124.65
  Top Layer w0.2: 82.425,121 82.8,121 86.475,124.675 F4.46@88.875,124.675
  Top Layer w0.25: SWDIO.1 77.225,115.75 81.505,115.75 Program.4 81.1,118.495 81.1,120.4 81.7,121 82.425,121
NetF4_49: F4.49 Program.2 SWCLK.1 | length 20.1
  Top Layer w0.25: SWCLK.1 77.2,110.45 81.285,110.45 Program.2 84.575,113.74 84.575,116.575 89.875,121.875 F4.49
NetF4_50: F4.50 R61.1 | length 35.5
  Top Layer w0.15: 88.575,119.025 89.3,119.75 90.525,119.75 91.4,120.625 F4.50@91.4,121.65
  Top Layer w0.25: 88.575,119.025 88.575,106 100.5,94.075 R61.1@101.625,94.075
NetF4_53: F4.53 R60.1 | length 33.2
  Top Layer w0.15: 92.9,103.575 F4.53@92.9,121.65
  Top Layer w0.25: 92.9,103.575 101.075,95.4 R60.1@104.65,95.4
NetF4_54: F4.54 R59.1 | length 34.1
  Top Layer w0.15: 93.4,104.925 F4.54@93.4,121.65
  Top Layer w0.25: 93.4,104.925 101.475,96.85 R59.1@107.425,96.85
NetF4_55: F4.55 R58.1 | length 35.4
  Top Layer w0.15: 93.9,106.425 F4.55@93.9,121.65
  Top Layer w0.25: 93.9,106.425 102.325,98 R58.1@110.6,98
NetF4_56: F4.56 R57.1 | length 36.6
  Top Layer w0.15: 94.4,107.7 F4.56@94.4,121.65
  Top Layer w0.25: 94.4,107.7 102.65,99.45 R57.1@113.65,99.45
NetF4_57: F4.57 R48.2 | length 38
  Top Layer w0.15: 94.9,109.1 F4.57@94.9,121.65
  Top Layer w0.25: 94.9,109.1 103.45,100.55 R48.2@116.775,100.55
NetF4_58: F4.58 R47.1 | length 38.8
  Top Layer w0.15: 95.4,110.825 F4.58@95.4,121.65
  Top Layer w0.25: 95.4,110.825 104.45,101.775 R47.1
NetF4_59: F4.59 R46.2 | length 40
  Top Layer w0.15: 95.9,111.95 F4.59
  Top Layer w0.25: 95.9,111.95 104.95,102.9 R46.2@122.25,102.9
NetF4_61: F4.61 R49.1 | length 11.3
  Top Layer w0.15: F4.61@96.9,121.65 96.9,118.875 100.575,115.2 101.8,115.2 102.75,114.25 R49.1
NetF4_62: F4.62 R50.1 | length 12.4
  Top Layer w0.15: F4.62@97.35,121.6 97.35,119.1 98.075,118.375 99.3,118.375 102.825,114.85 103.925,114.85 104.325,114.45 R50.1
"NetI2C Camera_1": "I2C Camera.1" "I2C Motor.1" R27.2 R29.2 SDA.1 | length 33.6
  Top Layer w0.25: R29.2 R27.2 87.5,145.975 93.525,152 SDA.1
  Top Layer w0.5: SDA.1@96.675,151.975 104.075,151.975 113.4,151.975
"NetI2C Camera_2": "I2C Camera.2" "I2C Motor.2" R26.1 R28.2 SCL.1 | length 36.7
  Top Layer w0.15: SCL.1@119.94,149.435 SCL.1
  Top Layer w0.25: 113.4,149.435 SCL.1@119.94,149.435
  Top Layer w0.33: R28.2 89.114,142.464 92.925,146.275 R26.1 98.6,148.4 99.635,149.435 104.075,149.435
  Top Layer w0.5: 104.075,149.435 113.4,149.435
NetIR_3: IR.3 R34.2 VS.1 | length 13
  Top Layer w0.33: IR.3@57.21,119.9 R34.2
  Top Layer w0.381: VS.1 55.1,119.4 55.61,119.91 IR.3 IR.3@57.21,119.9
NetIR_LED_1: IR_LED.1 R13.1 | length 1.5
  Top Layer w0.178: R13.1 IR_LED.1
NetP1_2: P1.2 P4.1 R36.2 VBAT.1 | length 29.3
  Top Layer w0.33: R36.2 108.865,82.4 P1.2@109.4,81.865 ; 106.125,89.075 107.725,90.675 VBAT.1
  Top Layer w1.016: P4.1 104.2,91 106.125,89.075 109.425,85.775 109.425,81.89 P1.2@109.4,81.865
NetP2_1: P2.1 P4.3 USB5V.1 | length 46.8
  Top Layer w0.229: P4.3@95.975,91.035 P4.3
  Top Layer w0.25: P2.1 63,104.975 v1(63.525,105.5)
  Top Layer w0.762: P4.3@95.975,91.035 v1(95.975,93.325)
  Bottom Layer w0.33: v1(63.525,105.5) 64.775,106.75 USB5V.1
  Bottom Layer w0.6: v1(63.525,105.5) 75.7,93.325 v1(95.975,93.325)
NetP2_2: P2.2 R1.2 | length 3.2
  Top Layer w0.25: P2.2 62.675,104.175
  Top Layer w0.254: 62.675,104.175 R1.2
NetP2_3: P2.3 R2.2 | length 3.4
  Top Layer w0.25: P2.3 62.025,103.375 R2.2
NetP5_2: P5.2 R3.1 | length 2.2
  Top Layer w0.33: P5.2 R3.1@109.3,108.15
NetR6_1: R6.1 S1.2 | length 3
  Top Layer w0.33: R6.1@106.15,136.6 S1.2
NetR8_1: R8.1 S2.2 | length 4.3
  Top Layer w0.33: S2.2 125,130.625 125.55,130.075 R8.1
NRST: C16.2 F4.7 NRST.1 Program.5 R7.1 S2.1 | length 54.8
  Top Layer w0.15: 92.25,123.025 92.975,123.75 92.975,124.325 96.25,127.6 98.05,127.6 99,126.65 F4.7 106.375,126.65
  Top Layer w0.178: 106.375,126.65 110.3,130.575 C16.2 C16.2@115.175,130.625 ; S2.1 S2.1@118.35,130.55
  Top Layer w0.2: 86.285,119.435 89.875,123.025 92.25,123.025 ; C16.2@115.175,130.625 S2.1
  Top Layer w0.33: Program.5@82.5,119.435 86.285,119.435 ; S2.1@118.35,130.7 118.35,133.35 119.2,134.2 R7.1 123.95,132.875 NRST.1
PH0_OSC: C14.2 F4.5 Y1.1 | length 11
  Top Layer w0.2: v3(97.475,125.3) 97.825,125.65 F4.5
  Bottom Layer w0.2: C14.2@93.425,124.05 Y1.1 95.45,125.3 v3(97.475,125.3)
PH1_OSC: C15.2 F4.6 Y1.2 | length 12.8
  Top Layer w0.2: v3(97.475,126.8) 98.125,126.15 F4.6
  Bottom Layer w0.3: v3(97.475,126.8) 98,127.325 Y1.2 C15.2
UART_CTS: BT1.10 F4.35 | length 35.8
  Top Layer w0.2: 82.3,133.5 85.65,130.15 F4.35@88.9,130.15
  Top Layer w0.25: BT1.10 56.75,133.725 57.475,133 70.675,133 71.175,133.5 82.3,133.5
UART_RTS: BT1.5 F4.34 | length 38.3
  Top Layer w0.2: 82.125,134.55 86.025,130.65 87.825,130.65 F4.34@88.9,130.65
  Top Layer w0.25: BT1.5 58.55,141.225 65.225,134.55 82.125,134.55
VIN: C11.1 F1.2 REG.1 | length 8.4
  Top Layer w0.457: C11.1 70.825,88.95 71.325,88.45 REG.1 72.625,84.675 F1.2
pads on no net: BT1.27 MT1.1 MT2.1 MT3.1 P2.6 P2.7 P2.8 P2.9 P2.MH1 P2.MH2 P4.5

## Polygon pours and split planes (outlines as drawn)
3V3 on Internal Plane 1 (split plane): 135.29,76.71 51.31,76.71 51.31,155.69 135.29,155.69
AGND on Internal Plane 2 (split plane): 116.896,76.71 61.304,76.71 61.304,93.946 64.954,97.596 116.896,97.596
DGND on Internal Plane 2 (split plane): 135.29,76.71 117.154,76.71 117.154,97.725 117.145,97.775 117.117,97.817 117.075,97.845 117.025,97.854 64.9,97.854 64.85,97.845 64.808,97.817 61.083,94.092 61.055,94.05 61.046,94 61.046,76.71 51.31,76.71 51.31,155.69 135.29,155.69

## Keep-outs
Keep-Out Layer:
  lines w0.3: 52.1,77.5 52.1,154.9 134.5,154.9 134.5,77.5 52.1,77.5

## Other copper
Internal Plane 2 (plane layer: these items are gaps in the copper):
  lines w0.254: 61.175,76.675 61.175,94 64.9,97.725 117.025,97.725 117.025,76.3

## Silkscreen, mask and mechanical layers (free items; w line width, h text height)
Top Overlay:
  text "Group 3 Comms" at 71.225,151.7 h1.52
Drill Drawing:
  text ".LEGEND" at 38.793,185.024 h1
  text "Drill Drawing." at 38.793,182.484 h1

## Dimensions
52.1,77.5 to 52.1,154.9 on Mechanical 1
52.1,77.5 to 134.5,77.5 on Mechanical 1

## Text inside footprints (layer, text, board x,y; h text height)
BT1: Top Overlay "this keepout area" at 43.9,142.825 h1 r90; Top Overlay "or any metal within" at 40.2,139.175 h1 r90; Top Overlay "Do not place copper" at 37.2,138.725 h1 r90
Dastardly: Top Overlay "2" at 130.195,105.205 h1.5 r270; Top Overlay "1" at 127.655,104.705 h1.5 r270; Top Overlay "10" at 130.195,91.645 h1.5 r270; Top Overlay "9" at 127.655,91.645 h1.5 r270
"I2C Camera": Top Overlay "1" at 109.273,151.561 h1
"I2C Motor": Top Overlay "1" at 99.948,151.561 h1
P1: Top Overlay "1" at 113.552,79.964 h1 r180
P2: Mechanical 1 "PCB Edge" at 51.793,107.411 h1 r270
P4: Top Overlay "6" at 91.05,88.575 h1; Top Overlay "5" at 91.15,90.675 h1; Top Overlay "2" at 100.25,88.075 h1; Top Overlay "1" at 100.3,90.55 h1
Program: Top Overlay "1" at 87.025,108.675 h1